# EAGLE board demon (EAGLE 9.6.2)

Size 100 x 80 mm. Coordinates in mm from the lower left corner, seen from the top.
Outline: 0,0 100,0 100,80 0,80 0,0
Copper layers (1*16): Top 0.035mm / dielectric 1.5mm / Bottom 0.035mm
Design rules "default": minimum track width 6mil, minimum drill 0.35mm, track to track 6mil, track to pad 6mil, pad to pad 6mil, via to via 6mil, smd to smd 6mil, copper to edge 40mil, drill to drill 6mil, minimum pad ring 10mil, minimum via ring 8mil, stop-mask expansion 4mil, vias tented up to drill 0mil, thermal gap 10mil
Milling: 60 lines

## Footprints (pad centres in the part's own frame; a part is rotated, then mirrored left to right if it is on the bottom)
TP20R = smd 2 x 2: TP 0,0
TP15R = smd 1.5 x 1.5: TP 0,0
C0603 = smd 1.1 x 1: 1 -0.85,0; 2 0.85,0
C2012 = smd 1.3 x 1.5: 1 -0.85,0; 2 0.85,0
XTAL_ABMM2-8.000MHZ-E2-T = smd 1.4 x 1.8: 1 -1.2,2.2; 2 -1.2,-2.2; 3 1.2,-2.2; 4 1.2,2.2
ESD_PGB1010603MR = smd 1.27 x 0.76: 1 -0.89,0; 2 0.89,0
CUI_UJ2-MIBH2-4-SMT = smd 1.2 x 0.4: 1 0,0; 2 0,-0.65; 3 0,-1.3; 4 0,-1.95; 5 0,-2.6 | drill 0.6 pad 1.2 long: SH1 -1.55,2.2; SH4 -1.55,-4.8 | drill 0.65 pad 1.05 long: SH2 0.55,0.925; SH5 0.55,-3.525 | smd 0.9 x 3: SH3 -1.55,-1.3
GCT_FFC3B07-05-T = smd 0.6 x 1.7: 1 2,2.45; 2 1,2.45; 3 0,2.45; 4 -1,2.45; 5 -2,2.45 | smd 2.5 x 2.8: S1 4.75,0; S2 -4.75,0
GCT_FFC3B07-08-T = smd 0.6 x 1.7: 1 3.5,2.45; 2 2.5,2.45; 3 1.5,2.45; 4 0.5,2.45; 5 -0.5,2.45; 6 -1.5,2.45; 7 -2.5,2.45; 8 -3.5,2.45 | smd 2.5 x 2.8: S1 6.25,0; S2 -6.25,0
INDC2015X152N = smd 1.09 x 1.75: 1 -0.959,0; 2 0.959,0
SOT23 = smd 1 x 1.4: 1 -0.95,-1.1; 2 0.95,-1.1; 3 0,1.1
SOT23-BEC = smd 1 x 1.4: B -0.95,-1.1; C 0,1.1; E 0.95,-1.1
R0603 = smd 1 x 1.1: 1 -0.85,0; 2 0.85,0
SW_EG1215AA = smd 0.7 x 1.5: 1 -2.25,1.75; 2 0.75,1.75; 3 2.25,1.75 | smd 1 x 0.8: S1 -3.65,1.05; S2 -3.65,-1.05; S3 3.65,-1.05; S4 3.65,1.05 | hole 0.9: -1.5,0; 1.5,0
QFN64 = smd 0.7 x 0.25: 1 -4.4,3.75; 2 -4.4,3.25; 3 -4.4,2.75; 4 -4.4,2.25; 5 -4.4,1.75; 6 -4.4,1.25; 7 -4.4,0.75; 8 -4.4,0.25; 9 -4.4,-0.25; 10 -4.4,-0.75; 11 -4.4,-1.25; 12 -4.4,-1.75; 13 -4.4,-2.25; 14 -4.4,-2.75; 15 -4.4,-3.25; 16 -4.4,-3.75; 33 4.4,-3.75; 34 4.4,-3.25; 35 4.4,-2.75; 36 4.4,-2.25; 37 4.4,-1.75; 38 4.4,-1.25; 39 4.4,-0.75; 40 4.4,-0.25; 41 4.4,0.25; 42 4.4,0.75; 43 4.4,1.25; 44 4.4,1.75; 45 4.4,2.25; 46 4.4,2.75; 47 4.4,3.25; 48 4.4,3.75 | smd 0.25 x 0.7: 17 -3.75,-4.4; 18 -3.25,-4.4; 19 -2.75,-4.4; 20 -2.25,-4.4; 21 -1.75,-4.4; 22 -1.25,-4.4; 23 -0.75,-4.4; 24 -0.25,-4.4; 25 0.25,-4.4; 26 0.75,-4.4; 27 1.25,-4.4; 28 1.75,-4.4; 29 2.25,-4.4; 30 2.75,-4.4; 31 3.25,-4.4; 32 3.75,-4.4; 49 3.75,4.4; 50 3.25,4.4; 51 2.75,4.4; 52 2.25,4.4; 53 1.75,4.4; 54 1.25,4.4; 55 0.75,4.4; 56 0.25,4.4; 57 -0.25,4.4; 58 -0.75,4.4; 59 -1.25,4.4; 60 -1.75,4.4; 61 -2.25,4.4; 62 -2.75,4.4; 63 -3.25,4.4; 64 -3.75,4.4
TSOP48 = smd 0.9 x 0.3: 1 -9.75,5.75; 2 -9.75,5.25; 3 -9.75,4.75; 4 -9.75,4.25; 5 -9.75,3.75; 6 -9.75,3.25; 7 -9.75,2.75; 8 -9.75,2.25; 9 -9.75,1.75; 10 -9.75,1.25; 11 -9.75,0.75; 12 -9.75,0.25; 13 -9.75,-0.25; 14 -9.75,-0.75; 15 -9.75,-1.25; 16 -9.75,-1.75; 17 -9.75,-2.25; 18 -9.75,-2.75; 19 -9.75,-3.25; 20 -9.75,-3.75; 21 -9.75,-4.25; 22 -9.75,-4.75; 23 -9.75,-5.25; 24 -9.75,-5.75; 25 9.75,-5.75; 26 9.75,-5.25; 27 9.75,-4.75; 28 9.75,-4.25; 29 9.75,-3.75; 30 9.75,-3.25; 31 9.75,-2.75; 32 9.75,-2.25; 33 9.75,-1.75; 34 9.75,-1.25; 35 9.75,-0.75; 36 9.75,-0.25; 37 9.75,0.25; 38 9.75,0.75; 39 9.75,1.25; 40 9.75,1.75; 41 9.75,2.25; 42 9.75,2.75; 43 9.75,3.25; 44 9.75,3.75; 45 9.75,4.25; 46 9.75,4.75; 47 9.75,5.25; 48 9.75,5.75
SOP50P310X90-8N = smd 1.12 x 0.27: 1 -1.405,0.75; 2 -1.405,0.25; 3 -1.405,-0.25; 4 -1.405,-0.75; 5 1.405,-0.75; 6 1.405,-0.25; 7 1.405,0.25; 8 1.405,0.75
SOP65P640X120-20N = smd 1.57 x 0.41: 1 -2.87,2.925; 2 -2.87,2.275; 3 -2.87,1.625; 4 -2.87,0.975; 5 -2.87,0.325; 6 -2.87,-0.325; 7 -2.87,-0.975; 8 -2.87,-1.625; 9 -2.87,-2.275; 10 -2.87,-2.925; 11 2.87,-2.925; 12 2.87,-2.275; 13 2.87,-1.625; 14 2.87,-0.975; 15 2.87,-0.325; 16 2.87,0.325; 17 2.87,0.975; 18 2.87,1.625; 19 2.87,2.275; 20 2.87,2.925
SOT229P700X180-4N = smd 1.31 x 0.93: 1 -3.345,2.29; 2 -3.345,0; 3 -3.345,-2.29 | smd 1.31 x 3.24: 4 3.345,0

## Placement (x,y rotation side)
5VSB  TPTP20R  [TP20R]  74.41,8.96 0 top
ALE1  TPTP15R  [TP15R]  57.87,9.12 0 top
C1  18pf  [C0603]  29.25,13.88 0 top
C2  18pf  [C0603]  25.17,13.88 0 top
C3  47pf  [C0603]  32.88,14.91 270 top
C4  1uf  [C0603]  -15.24,60.96 0 top  (outside the outline)
C5  .1uf  [C0603]  -57.15,55.88 0 top  (outside the outline)
C6  .1uf  [C0603]  29.88,29.23 270 top
C7  .1uf  [C0603]  -67.31,55.88 0 top  (outside the outline)
C8  .1uf  [C0603]  40.38,21.39 270 top
C9  .1uf  [C0603]  64.38,21.47 270 top
C11  1uf  [C0603]  -52.07,55.88 0 top  (outside the outline)
C12  .1uf  [C0603]  75.51,1.38 0 top
C13  2.2uf tant  [C2012]  66.37,1.55 180 top
C14  1uf tant  [C2012]  71.12,1.45 0 top
C15  10uf Tant  [C2012]  57.74,1.45 0 top
CE  TPTP15R  [TP15R]  57.92,6.62 0 top
CLE1  TPTP15R  [TP15R]  56.22,8.12 0 top
CR_EN  TPTP15R  [TP15R]  24.49,3.04 0 top
CRST  ABMM2-8.000MHZ-E2-T  [XTAL_ABMM2-8.000MHZ-E2-T]  27.13,11.01 270 top
D0  TPTP15R  [TP15R]  82.3,16.12 0 top
D1  TPTP15R  [TP15R]  83.99,14.12 0 top
D1_ESD  PGB1010603  [ESD_PGB1010603MR]  11.23,27.45 0 top
D2  TPTP15R  [TP15R]  82.26,12.2 0 top
D2_ESD  PGB1010603  [ESD_PGB1010603MR]  11.34,28.95 0 top
D3  TPTP15R  [TP15R]  83.95,10.7 0 top
D4  TPTP15R  [TP15R]  82.14,9.2 0 top
D5  TPTP15R  [TP15R]  83.83,7.7 0 top
D6  TPTP15R  [TP15R]  82.02,6.7 0 top
D7  TPTP15R  [TP15R]  83.71,4.7 0 top
GND  TPTP15R  [TP15R]  10.79,32.12 0 top
J1  UJ2-MIBH2-4-SMT  [CUI_UJ2-MIBH2-4-SMT]  2.53,23.89 0 top
J2  FFC3B07-05-T  [GCT_FFC3B07-05-T]  13.17,8.13 0 top
J3  FFC3B07-08-T  [GCT_FFC3B07-08-T]  12.41,22.13 0 top
L1  LQW2BAS6N8J00L  [INDC2015X152N]  73.72,5.79 90 top
L2  LQW2BAS6N8J00L  [INDC2015X152N]  -36.83,81.28 0 top  (outside the outline)
LED  TPTP15R  [TP15R]  14.89,32.12 0 top
Q1  BC846  [SOT23]  43.21,2.71 180 top
Q2  BC846  [SOT23]  35.71,8.17 90 top
Q3  bc856  [SOT23-BEC]  36.82,15.29 0 top
R1  22R 5%  [R0603]  40.7,1.73 90 top
R2  470R 5%  [R0603]  34.2,14.68 90 top
R3  2k7R 5%  [R0603]  35.49,18.7 180 top
R4  330R 5%  [R0603]  40.3,15.71 270 top
R5  22r 5%  [R0603]  15.33,27.38 0 top
R6  22R 5%  [R0603]  15.34,28.8 0 top
R9  10kR 5%  [R0603]  -55.88,50.8 0 top  (outside the outline)
R10  68R 5%  [R0603]  -19.05,55.88 0 top  (outside the outline)
R11  680R 5%  [R0603]  -38.1,50.8 0 top  (outside the outline)
RB1  TPTP15R  [TP15R]  57.81,4.62 0 top
RE  TPTP15R  [TP15R]  56.11,5.62 0 top
RST  TPTP15R  [TP15R]  16.97,32.12 0 top
RX_UART  TPTP15R  [TP15R]  26.16,1.19 0 top
SBR_EJ/PO  TPTP15R  [TP15R]  22.98,1.19 0 top
SW1  EG1215AA  [SW_EG1215AA]  5.05,31.44 180 top
TCK_CR  TPTP15R  [TP15R]  30.12,3.04 0 top
TCK_MC  TPTP15R  [TP15R]  20.79,32.04 0 top
TDI_CR  TPTP15R  [TP15R]  32.11,1.04 0 top
TDI_MC  TPTP15R  [TP15R]  27.73,32.04 0 top
TDO_CR  TPTP15R  [TP15R]  34.4,3.54 0 top
TDO_MC  TPTP15R  [TP15R]  25.22,32.19 0 top
TMS_CR  TPTP15R  [TP15R]  29.01,1.04 0 top
TMS_MC  TPTP15R  [TP15R]  23.18,32.04 0 top
TST  TPTP15R  [TP15R]  18.73,32.12 0 top
TX_UART  TPTP15R  [TP15R]  27.5,3.19 0 top
U1  [QFN64]  28.14,22.16 0 top
U2  HY27US08281A  [TSOP48]  52.09,20.35 0 top
U3  SN74LVC2G00DCUT  [SOP50P310X90-8N]  41.45,7.21 270 top
U4  SN74LVC2G02DCUR  [SOP50P310X90-8N]  40.71,11.77 90 top
U5  SN74LVTH245APW  [SOP65P640X120-20N]  48.85,7.13 0 top
VCC  TPTP15R  [TP15R]  13.05,32.12 0 top
VR1  AMS1117-3.3  [SOT229P700X180-4N]  68.04,6.62 0 top
WE1  TPTP15R  [TP15R]  56.21,10.12 0 top
WP1  TPTP15R  [TP15R]  58.13,11.62 0 top
X0  TPTP15R  [TP15R]  26.9,36.2 0 top
X1  TPTP15R  [TP15R]  28.59,34.7 0 top
X2  TPTP15R  [TP15R]  30.28,36.2 0 top
X3  TPTP15R  [TP15R]  31.97,34.7 0 top
X4  TPTP15R  [TP15R]  33.66,36.2 0 top
X5  TPTP15R  [TP15R]  35.35,34.7 0 top
X6/SYNC  TPTP15R  [TP15R]  37.11,36.19 0 top
X7_KIOSK  TPTP15R  [TP15R]  45.82,34.19 0 top
X8  TPTP15R  [TP15R]  48.04,35.7 0 top
Y0  TPTP15R  [TP15R]  9.23,1.2 0 top
Y1  TPTP15R  [TP15R]  10.42,2.7 0 top
Y2  TPTP15R  [TP15R]  11.61,1.2 0 top
Y3  TPTP15R  [TP15R]  13.3,2.7 0 top
Y4  TPTP15R  [TP15R]  14.99,1.2 0 top
Y5  TPTP15R  [TP15R]  16.26,2.78 0 top
Y6  TPTP15R  [TP15R]  17.95,1.28 0 top
Y7  TPTP15R  [TP15R]  20.64,4.28 0 top

## Library data of the parts
5VSB ALE1 CE CLE1 CR_EN D0 D1-D7 GND LED RB1 RE RST RX_UART SBR_EJ/PO TCK_CR TCK_MC TDI_CR TDI_MC TDO_CR TDO_MC TMS_CR TMS_MC TST TX_UART VCC WE1 WP1 X0 X1-X5 X6/SYNC X7_KIOSK X8 Y0 Y1-Y7 = testpad
C1-C9 C11 C12 = rcl; SPICEPREFIX: C
C13-C15 = eagle-ltspice; SPICEMODEL: NONE; SPICEPREFIX: C
CRST = ABMM2-8.000MHZ-E2-T; AVAILABILITY: In Stock; DESCRIPTION: 8 MHz ±20ppm Crystal 18pF 72 Ohms 4-SMD, No Lead; MF: Abracon; MP: ABMM2-8.000MHZ-E2-T; PACKAGE: SMD-4 Abracon; PRICE: None; PURCHASE-URL: https://pricing.snapeda.com/search/part/ABMM2-8.000MHZ-E2-T/?ref=eda
D1_ESD D2_ESD = PGB1010603; AVAILABILITY: In Stock; DESCRIPTION: 150V (Typ) Clamp - Ipp Tvs Diode Surface Mount 0603 (1608 Metric); MF: Littelfuse Inc.; MP: PGB1010603; PACKAGE: 0603 Littelfuse Inc.; PRICE: None; PURCHASE-URL: https://pricing.snapeda.com/search/part/PGB1010603/?ref=eda
J1 = UJ2-MIBH2-4-SMT; AVAILABILITY: In Stock; CUI_PURCHASE_URL: https://www.cuidevices.com/product/interconnect/connectors/usb-connectors/uj2-mibh2-4-smt?utm_source=snapeda.com&utm_medium=referral&utm_campaign=snapedaBOM; DESCRIPTION: Micro B, USB 2.0, 1.8 A, Right Angle, Surface Mount (SMT), USB Receptacle; MF: CUI Devices; MP: UJ2-MIBH2-4-SMT; PACKAGE: None; PRICE: None; PURCHASE-URL: https://pricing.snapeda.com/search/part/UJ2-MIBH2-4-SMT/?ref=eda
J2 = FFC3B07-05-T; AVAILABILITY: In Stock; DESCRIPTION: 5 Position FFC, FPC Connector Contacts, Bottom 0.039 (1.00mm) Surface Mount, Right Angle; MF: Global Connector Technology; MP: FFC3B07-05-T; PACKAGE: None; PRICE: None; PURCHASE-URL: https://pricing.snapeda.com/search/part/FFC3B07-05-T/?ref=eda
J3 = FFC3B07-08-T; AVAILABILITY: In Stock; DESCRIPTION: 8 Position FFC, FPC Connector Contacts, Bottom 0.039 (1.00mm) Surface Mount, Right Angle; MF: Global Connector Technology; MP: FFC3B07-08-T; PACKAGE: None; PRICE: None; PURCHASE-URL: https://pricing.snapeda.com/search/part/FFC3B07-08-T/?ref=eda
L1 L2 = LQW2BAS6N8J00L; AVAILABILITY: In Stock; DESCRIPTION: Inductor with Inductance: 6.8nH Tol. +/-5%, Package: 0805 (2015); MF: Murata; MP: LQW2BAS6N8J00L; PACKAGE: 2015 Murata; PRICE: None; PURCHASE-URL: https://pricing.snapeda.com/search/part/LQW2BAS6N8J00L/?ref=eda
Q1-Q3 = transistor
R1-R6 R9-R11 = resistor
SW1 = EG1215AA; AVAILABILITY: In Stock; DESCRIPTION: Slide Switch SPDT Surface Mount, Right Angle; MF: E-Switch; MP: EG1215AA; PACKAGE: None; PRICE: None; PURCHASE-URL: https://pricing.snapeda.com/search/part/EG1215AA/?ref=eda
U1 = controller-micro_atmel_jd
U2 = memory-hynix
U3 = SN74LVC2G00DCUT; AVAILABILITY: In Stock; DESCRIPTION: 2-ch, 2-input, 1.65-V to 5.5-V NAND gates; MF: Texas Instruments; MP: SN74LVC2G00DCUT; PACKAGE: VSSOP-8 Texas Instruments; PRICE: None; PURCHASE-URL: https://pricing.snapeda.com/search/part/SN74LVC2G00DCUT/?ref=eda
U4 = SN74LVC2G02DCUR; AVAILABILITY: In Stock; DESCRIPTION: 2-ch, 2-input, 1.65-V to 5.5-V NOR gates; MF: Texas Instruments; MP: SN74LVC2G02DCUR; PACKAGE: VSSOP-8 Texas Instruments; PRICE: None; PURCHASE-URL: https://pricing.snapeda.com/search/part/SN74LVC2G02DCUR/?ref=eda
U5 = SN74LVTH245APW; AVAILABILITY: In Stock; DESCRIPTION: 3.3-V ABT Octal Bus Transceivers With 3-State Outputs; MF: Texas Instruments; MP: SN74LVTH245APW; PACKAGE: TSSOP-20 Texas Instruments; PRICE: None; PURCHASE-URL: https://pricing.snapeda.com/search/part/SN74LVTH245APW/?ref=eda
VR1 = AMS1117-3.3; AVAILABILITY: In Stock; DESCRIPTION: Sot223/Pkg 1-Amp 3.3-Volt Low Drop Out Voltage Regulatator; MF: Advanced Monolithic Systems; MP: AMS1117-3.3; PACKAGE: SOT-223 Seeed Technology; PRICE: None; PURCHASE-URL: https://pricing.snapeda.com/search/part/AMS1117-3.3/?ref=eda

## Nets
0: C7.2 U5.7 U5.8 U5.9 U5.10
ALE: ALE1.TP U2.17 U5.16
ALE_MC: U1.37 U5.4
AREF: U1.62
CE_1: R10.2 U1.33 U3.6
CE_2: U2.9 U3.3
CE_XB: C3.2 CE.TP Q1.1 Q2.3 R2.2
CLE: CLE1.TP U2.16 U5.15
CLE_MC: U1.36 U5.5
CR_EN: CR_EN.TP J2.1 U1.26
D0: D0.TP U1.51 U2.29
D1: D1.TP U1.50 U2.30
D2: D2.TP U1.49 U2.31
D3: D3.TP U1.48 U2.32
D4: D4.TP U1.47 U2.41
D5: D5.TP U1.46 U2.42
D6: D6.TP U1.45 U2.43
D7: D7.TP U1.44 U2.44
F_5VSB: C12.1 C14.1 L1.1 VR1.3
GND: C1.2 C2.2 C4.2 C5.1 C6.1 C8.2 C9.2 C11.1 C12.2 C13.2 C14.2 C15.2 CRST.2 CRST.4 D1_ESD.1 D2_ESD.1 GND.TP J1.SH1 J1.SH2 J1.SH3 J1.SH4 J1.SH5 J2.S1 J2.S2 J3.8 J3.S1 J3.S2 L2.1 Q2.2 R4.1 R9.2 U1.6 U1.22 U1.53 U1.63 U2.13 U2.36 U3.4 U4.2 U4.4 VR1.1
LED: J3.6 LED.TP U1.19
N$1: R5.2 U1.4
N$2: C3.1 Q3.B R2.1 R3.2
N$3: C4.1 U1.7
N$4: R6.2 U1.5
N$6: Q1.3 R1.1
N$7: Q1.2 R10.1
N$8: 5VSB.TP L1.2
N$20: U3.5 U3.7
N$32: U3.1 U4.3
N$33: R11.2 U4.7
N$34: Q2.1 R11.1
N$36: Q3.C R3.1 R4.2 U4.5 U4.6
N$37: J1.1 SW1.1
NAND_BTN: J3.7 R9.1 U1.18
OE: U1.41 U3.2 U4.1 U5.19
P_GND: J1.5 J3.5 L2.2
RB: RB1.TP U1.40 U2.7
RE: RE.TP U2.8 U5.14
RE_MC: U1.35 U5.6
RST: RST.TP U1.20
RX_UART: RX_UART.TP U1.27
SBR: SBR_EJ/PO.TP U1.25
TCK_CR: J2.5 TCK_CR.TP U1.30
TCK_MC: TCK_MC.TP U1.57
TD0_MC: TDO_MC.TP U1.55
TDI_CR: J2.3 TDI_CR.TP U1.31
TDI_MC: TDI_MC.TP U1.54
TDO_CR: J2.4 TDO_CR.TP U1.32
TMS_CR: J2.2 TMS_CR.TP U1.29
TMS_MC: TMS_MC.TP U1.56
TST: TST.TP U1.58
TX_UART: TX_UART.TP U1.28
USB_D+: D2_ESD.2 J1.3 J3.4 R6.1
USB_D-: D1_ESD.2 J1.2 J3.3 R5.1
USB_ID: J1.4
USB_VB: J3.2 U1.8
VCC: C5.2 C6.2 C7.1 C8.1 C9.1 C11.2 C13.1 C15.1 J3.1 Q3.E R1.2 SW1.2 U1.3 U1.21 U1.52 U1.64 U2.12 U2.37 U3.8 U4.8 U5.1 U5.20 VCC.TP VR1.2
WE: U2.18 U5.17 WE1.TP
WE_MC: U1.38 U5.3
WP: U2.19 U5.18 WP1.TP
WP_MC: U1.39 U5.2
X0: U1.61 X0.TP
X1: U1.60 X1.TP
X2: U1.59 X2.TP
X3: U1.42 X3.TP
X4: U1.34 X4.TP
X5: U1.43 X5.TP
X6/SYNC: U1.9 X6/SYNC.TP
X7: U1.1 X7_KIOSK.TP
X8: U1.2 X8.TP
XTAL1: C2.1 CRST.3 U1.24
XTAL2: C1.1 CRST.1 U1.23
Y0: U1.10 Y0.TP
Y1: U1.11 Y1.TP
Y2: U1.12 Y2.TP
Y3: U1.13 Y3.TP
Y4: U1.14 Y4.TP
Y5: U1.15 Y5.TP
Y6: U1.16 Y6.TP
Y7: U1.17 Y7.TP

## Tracks (layer width: path | path; a pad name or v marks a point on that pad's centre or on a via)
0  (4 unrouted)
ALE  (2 unrouted)
ALE_MC  (1 unrouted)
CE_1  (2 unrouted)
CE_2  (1 unrouted)
CE_XB  (4 unrouted)
CLE  (2 unrouted)
CLE_MC  (1 unrouted)
CR_EN  (2 unrouted)
D0  (2 unrouted)
D1  (2 unrouted)
D2  (2 unrouted)
D3  (2 unrouted)
D4  (2 unrouted)
D5  (2 unrouted)
D6  (2 unrouted)
D7  (2 unrouted)
F_5VSB  (3 unrouted)
GND  (40 unrouted)
LED  (2 unrouted)
N$1  (1 unrouted)
N$2  (3 unrouted)
N$3  (1 unrouted)
N$4  (1 unrouted)
N$6  (1 unrouted)
N$7  (1 unrouted)
N$8  (1 unrouted)
N$20  (1 unrouted)
N$32  (1 unrouted)
N$33  (1 unrouted)
N$34  (1 unrouted)
N$36  (4 unrouted)
N$37  (1 unrouted)
NAND_BTN  (2 unrouted)
OE  (3 unrouted)
P_GND  (2 unrouted)
RB  (2 unrouted)
RE  (2 unrouted)
RE_MC  (1 unrouted)
RST  (1 unrouted)
RX_UART  (1 unrouted)
SBR  (1 unrouted)
TCK_CR  (2 unrouted)
TCK_MC  (1 unrouted)
TD0_MC  (1 unrouted)
TDI_CR  (2 unrouted)
TDI_MC  (1 unrouted)
TDO_CR  (2 unrouted)
TMS_CR  (2 unrouted)
TMS_MC  (1 unrouted)
TST  (1 unrouted)
TX_UART  (1 unrouted)
USB_D+  (3 unrouted)
USB_D-  (3 unrouted)
USB_VB  (1 unrouted)
VCC  (23 unrouted)
WE  (2 unrouted)
WE_MC  (1 unrouted)
WP  (2 unrouted)
WP_MC  (1 unrouted)
X0  (1 unrouted)
X1  (1 unrouted)
X2  (1 unrouted)
X3  (1 unrouted)
X4  (1 unrouted)
X5  (1 unrouted)
X6/SYNC  (1 unrouted)
X7  (1 unrouted)
X8  (1 unrouted)
XTAL1  (2 unrouted)
XTAL2  (2 unrouted)
Y0  (1 unrouted)
Y1  (1 unrouted)
Y2  (1 unrouted)
Y3  (1 unrouted)
Y4  (1 unrouted)
Y5  (1 unrouted)
Y6  (1 unrouted)
Y7  (1 unrouted)